# Altium PCB NRF52832_ball_RevB.PcbDoc
Units mm, origin at the board's own origin, x right, y up, seen from the top; angles counter-clockwise.
Board outline 28 x 22 mm, 4 copper layers (Top Layer, Layer 1, Layer 2, Bottom Layer), stack 1.561 mm thick; 65 components, 53 nets, 256 pads, 53 vias.
Unrouted connection lines stored in the file: 184.
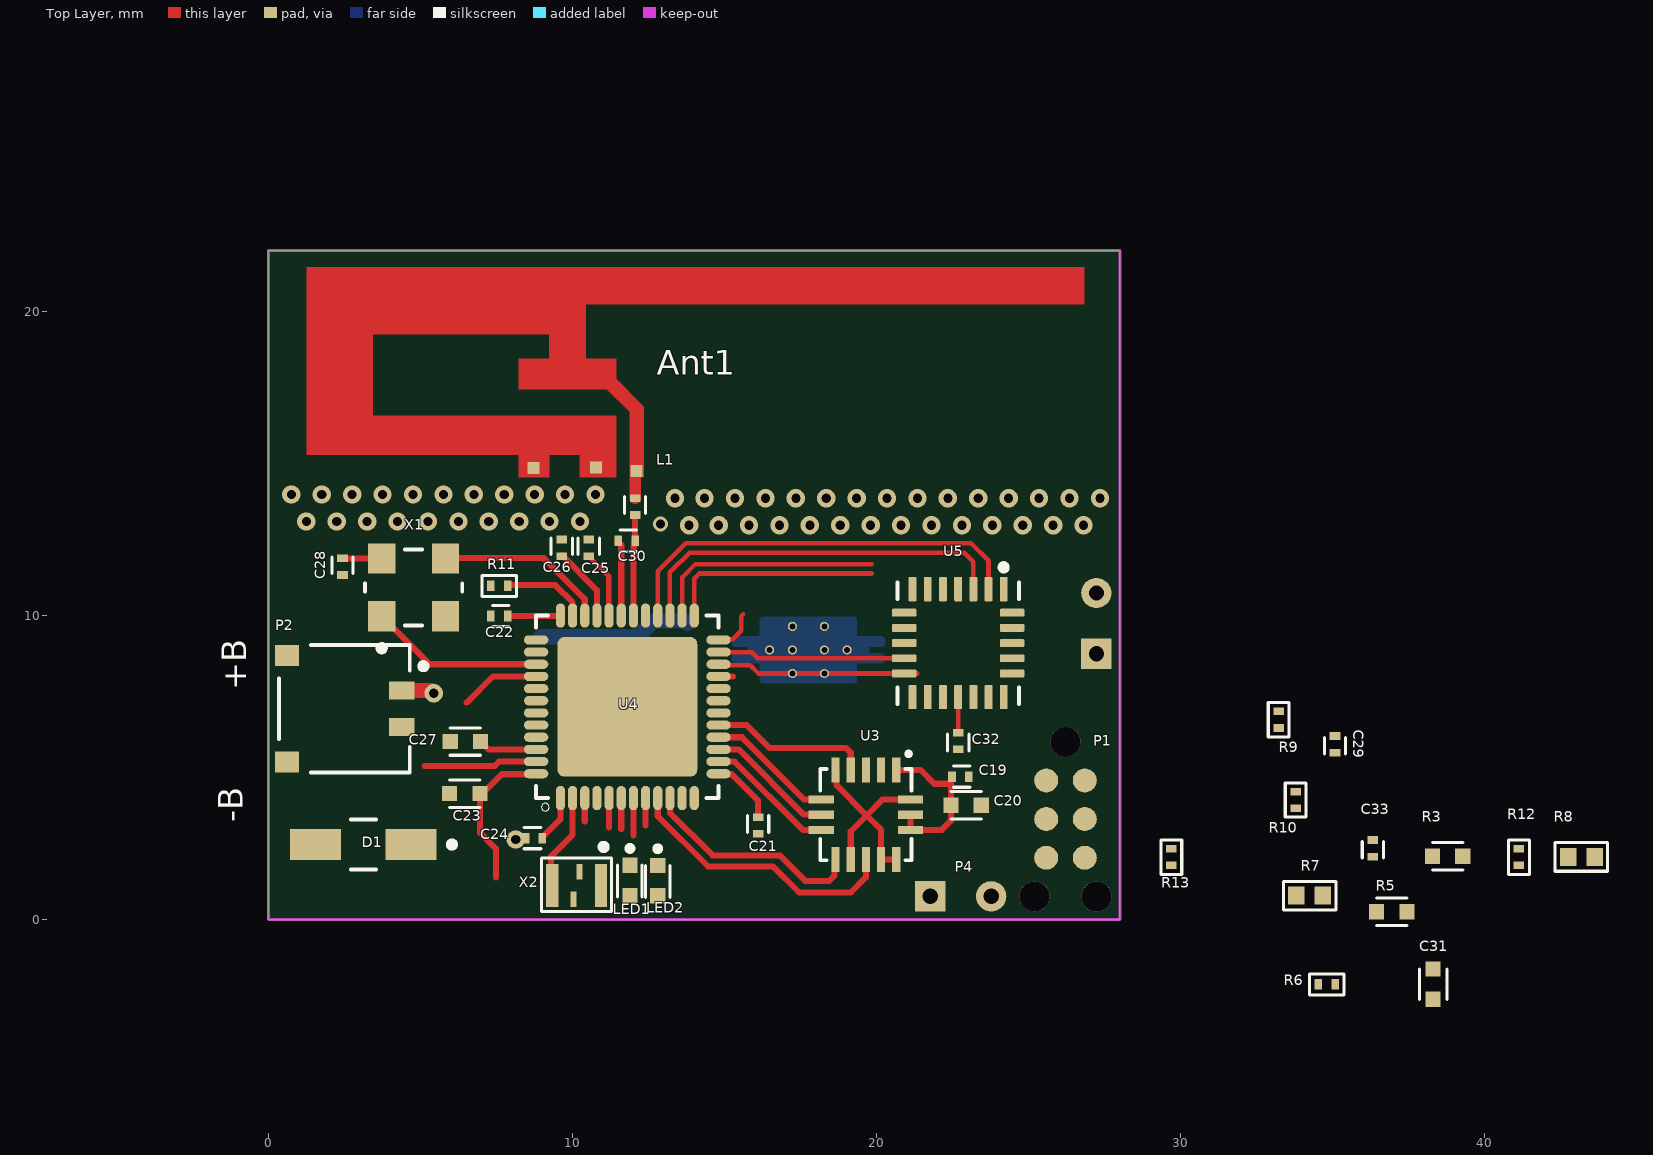
[diagram p0: Top Layer view]
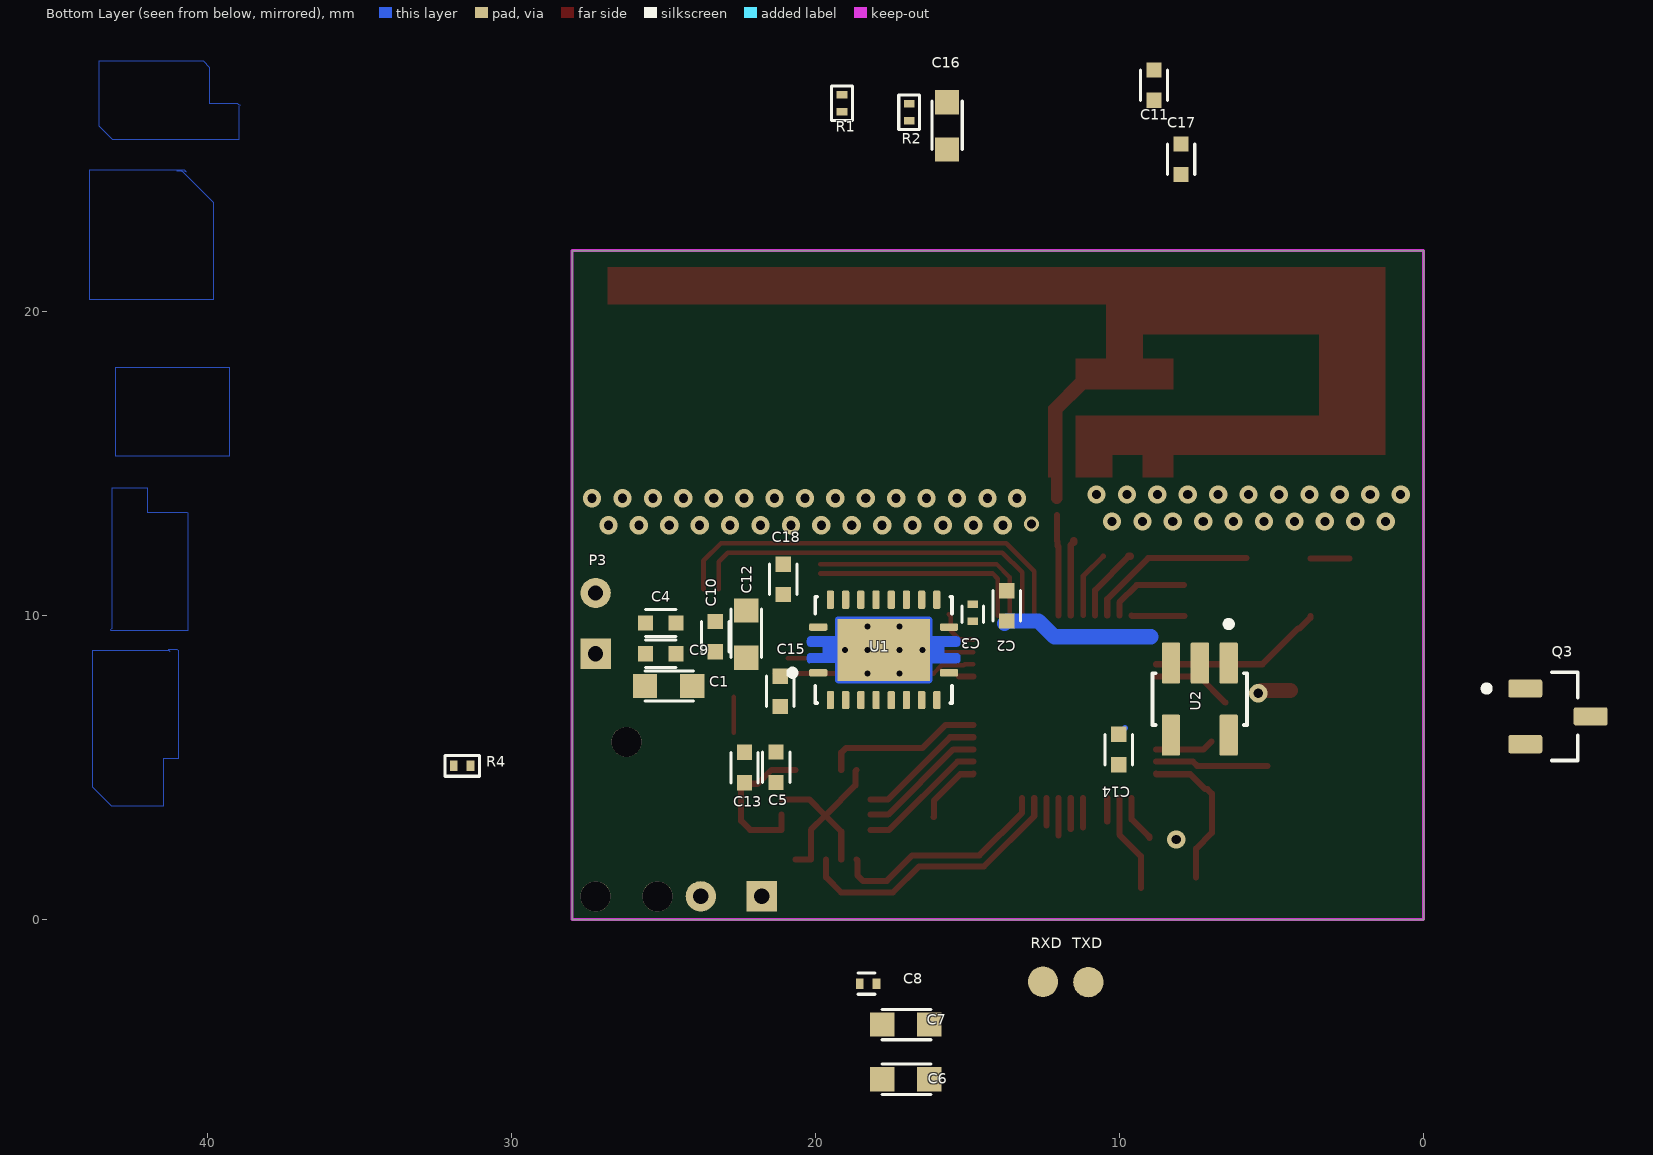
[diagram p1: Bottom Layer view, seen from below]

## Layer stack, top to bottom
Top Solder: solder mask 0.0102, Solder Resist, Dk 3.5
Top Layer: signal copper 0.0356
Dielectric 2: prepreg 0.11, PP-006, Dk 4.29
Layer 1: signal copper 0.035
Dielectric 1: dielectric 1.2, FR-4, Dk 4.8
Layer 2: signal copper 0.035
Dielectric 3: prepreg 0.11, PP-006, Dk 4.29
Bottom Layer: signal copper 0.0356
Bottom Solder: solder mask 0.0102, Solder Resist, Dk 3.5

## Board outline
0,0 0,22 28,22 28,0

## Design rules (kind name [scope] priority, off if disabled: settings)
Clearance [All] p1: gap=0.254 ignorepadtopadclearanceinfootprint=TRUE except(0: Arc-Hole Track-Hole SMDPad-Hole THPad-Hole Via-Hole Fill-Hole Poly-Hole Region-Hole Text-Hole; 0.15: Arc-SMDPad Track-SMDPad; 0.16: Arc-Arc Arc-Track Track-Track; 0.18: SMDPad-Fill SMDPad-Poly SMDPad-Region; 0.2: Arc-THPad Arc-Via Arc-Fill Arc-Poly Arc-Region Track-THPad Track-Via Track-Fill Track-Poly Track-Region SMDPad-SMDPad SMDPad-THPad SMDPad-Via THPad-THPad)
ComponentClearance [All] p1: gap=0.01 collisioncheckmode=3 verticalgap=0.01 showdistances=FALSE
PlaneClearance [All] p1: clearance=0.3
PolygonConnect [All] p1: connectstyle=Direct reliefconductorwidth=0.254 reliefentries=4 polygonreliefangle="90 Angle" airgapwidth=0.254
RoomDefinition NRF52832_ball_RevB [InComponentClass('NRF52832_ball_RevB')] p1: confinementstyle=ConfineOut formatcopy=TRUE lockcomponents=FALSE outline -329.641,-168.758 -278.841,-168.758 -278.841,-143.358 -329.641,-143.358
RoutingVias [All] p1: holewidth=0.3 width=0.5 viastyle="Through Hole" minholewidth=0.2 minwidth=0.4 maxholewidth=5 maxwidth=7
SolderMaskExpansion [All] p1: expansion=0.102 istentingtop=FALSE
Width [All] p1: maxlimit=5 minlimit=0.15 preferedwidth=0.254 toplayer_prefwidth=0.2 midlayer1_minwidth=0.254 midlayer2_minwidth=0.254 bottomlayer_prefwidth=0.2 minimp=50.000000 maximp=50.000000 favimp=50.000000
28 further rules are at their usual default settings.

## Components (designator, comment, footprint, x,y, rotation, side; value= is the part's Value field where it differs from the comment)
Ant1 "Antenna" INVERTED_F_ANTENNA 1.253,14.539 r0 top
C1 "68nF" C0603 25.605,7.679 r180 bottom
C2 "1uF" C0402 13.71,9.815 r90 bottom
C3 "100nF" C0201 14.828,9.815 r90 bottom
C4 "47nF" C0402 25.583,9.752 r180 bottom
C5 "10nF" C0402 21.292,5.507 r270 bottom
C6 "10uF" C0603 17.805,-5.258 r180 bottom
C7 "10uF" C0603 17.805,-3.454 r180 bottom
C8 "100nF" C0201 18.542,-2.108 r180 bottom
C9 "39nF" C0402 25.583,8.736 r180 bottom
C10 "100pF" C0402 23.292,8.804 r90 bottom
C11 "22nF" C0402 8.865,26.94 r90 bottom
C12 "2.2nF" C0603 22.276,8.61 r90 bottom
C13 "470nF" C0402 22.333,5.497 r270 bottom
C14 "4.7uF" C0402 10.026,6.09 r270 bottom
C15 "10nF" C0402 21.158,7.001 r90 bottom
C16 "22uF" C0603 15.672,25.324 r90 bottom
C17 "22nF" C0402 7.976,25.502 r270 bottom
C18 "470nF" C0402 21.057,10.684 r90 bottom
C19 "100nF" C0201 23.029,4.699 r180 top
C20 "1uF" C0402 22.444,3.759 r0 top
C21 "100nF" C0201 16.104,3.369 r270 top
C22 "100nF" C0201 7.865,9.982 r180 top
C23 "4.7uF" C0402 5.96,4.14 r0 top
C24 "100nF" C0201 8.46,2.677 r0 top
C25 "100nF" C0201 10.534,12.498 r270 top
C26 "100nF" C0201 9.645,12.498 r270 top
C27 "1uF" C0402 6.978,5.852 r180 top
C28 "100nF" C0201 2.438,11.878 r270 top
C29 "100nF" C0201 35.077,5.486 r90 top
C30 "0.8pF" C0201 12.058,12.456 r180 top
C31 "1uF" C0402 38.303,-2.626 r90 top
C32 "100nF" C0201 22.682,5.597 r90 top
C33 "100nF" C0201 36.322,2.066 r90 top
D1 "MBR120LSFT3" SOD-123FL 3.124,2.464 r180 top
L1 "3.9nH  Inductor" C0201 12.058,13.853 r270 top
LED1 "GREEN" "led 0402" 11.887,1.787 r270 top
LED2 "RED" "led 0402" 12.802,1.778 r270 top
P1 "NO FIT" TAG_TC2030-IDC-NL 26.213,3.302 r270 top
P2 "BM02B-ACHSS-GAN-TF(LF)(SN)" JST_BM02B-ACHSS-GAN-TF(LF)(SN) 2.497,6.932 r270 top
P3 "Coil" "2 pin" 27.229,8.738 r90 bottom
P4 "NO FIT" "2 pin" 21.768,0.762 r0 top
Q3 "DMG3415U-7" SOT-23 -4.42,6.68 r180 bottom
R1 "10K" R0201 19.126,26.568 r90 bottom
R2 "100K" R0201 16.916,26.822 r270 bottom
R3 "390R" C0402 38.278,2.083 r0 top
R4 "1K" R0201 31.344,5.055 r0 bottom
R5 "200R" C0402 36.44,0.254 r0 top
R6 "47K" R0201 35.077,-2.134 r180 top
R7 "330R" R0402 34.239,0.787 r0 top
R8 "330R" R0402 43.18,2.057 r0 top
R9 "4.7K" R0201 33.223,6.299 r90 top
R10 "4.7K" R0201 33.782,3.658 r90 top
R11 "1K" R0201 7.865,10.973 r180 top
R12 "100K" R0201 41.123,1.778 r90 top
R13 "1K" R0201 29.693,1.778 r90 top
RXD "TP" TP 12.515,-2.048 r90 bottom
TXD "TP" TP 11.024,-2.057 r90 bottom
U1 "BQ51050BRHLR" QFN-20-EP(3.7X4.7) 17.757,8.866 r90 bottom
U2 "AP2112K-3.3TRG1" SOT-25-5 7.359,7.249 r270 bottom
U3 "H3LIS331DLTR" TFLGA-16(3x3) 19.65,3.448 r270 top
U4 "NRF52832-QFAA-R" VFQFN-48 11.804,6.995 r90 top
U5 "FXAS21002CQR1" QFN50P400X400X105-24N 22.682,9.09 r270 top
X1 "ASEMB-32.000MHZ-LY-T" XTAL_ASEMB-32.000MHZ-LY-T 4.775,10.922 r90 top
X2 "SIT1533AC-H5-DCC-32.768" SMD2012-4P 10.135,1.118 r180 top

## Footprints (in the part's own frame and the unit in brackets; to place one, negate y for a bottom-side part, rotate by r counter-clockwise, add the part's x,y. Pads: shape width x height; smd on the part's side, far side on the other; paste and mask are expansions set on the pad)
"2 pin" [mm]
  rect 1x1 hole 0.5: 1(0,0)
  round 1 hole 0.5: 2(2,0)
C0201 [mm]
  rect 0.25x0.35 smd: 1(0,0) 2(0.55,0)
  silkscreen extent -0.05,-0.35 0.5,0.35, body extent 0,-0.15 0.6,0.15, height 0.29
C0402 [mm]
  rect 0.5x0.5 smd: 1(0,0) 2(1,0)
  silkscreen extent 0,-0.45 1,0.45, body extent 0,-0.25 1,0.25, height 0.55
C0603 [mm]
  rect 0.8x0.8 smd: 1(0,0) 2(1.55,0)
  silkscreen extent 0,-0.5 1.6,0.5, body extent 0,-0.4 1.6,0.4, height 0.81
INVERTED_F_ANTENNA [mm]
  rect 0.4x0.4 smd mask+0.102: 1(10.85,0.21) 2(7.468,0.305) 2(9.525,0.33)
  Top Layer region: 25.58,6.91 0,6.91 0,0.74 6.98,0.74 6.98,0 7.98,0 7.98,0.74 8.98,0.74 8.98,0 10.18,0 10.18,2.03 2.18,2.03 2.18,4.7 7.98,4.7 7.98,3.9 6.98,3.9 6.98,2.9 10.18,2.9 10.18,3.9 9.18,3.9 9.18,5.7 9.18,5.7 9.18,5.7 9.18,5.7 9.18,5.7 9.18,5.7 9.18,5.7 9.18,5.7 9.18,5.7 9.18,5.7 9.18,5.7 25.58,5.7
  Top Layer region: 10.63,0 11.09,0 11.09,2.327 10.63,2.327
  Top Layer region: 9.741,3.035 10.066,3.36 11.095,2.332 10.77,2.007
JST_BM02B-ACHSS-GAN-TF(LF)(SN) [mm]
  rect 0.6x0.85 smd: 1(-0.6,1.887) 2(0.6,1.887)
  rect 0.7x0.8 smd: S1(-1.75,-1.887) S2(1.75,-1.887)
  silkscreen extent -2.1,-2.15 2.1,2.7, body extent -2.1,-2.15 2.1,2.15, height 1.45
"led 0402" [mm]
  rect 0.5x0.5 smd: 1(0,0) 2(1,0)
  silkscreen extent -0.6,-0.4 1.05,0.4, body extent 0,-0.25 1,0.25, height 0.16
QFN50P400X400X105-24N [mm]
  rrect25% 0.8x0.26 smd: 1(-1.775,1.5) 2(-1.775,1) 3(-1.775,0.5) 4(-1.775,0) 5(-1.775,-0.5) 6(-1.775,-1) 7(-1.775,-1.5) 13(1.775,-1.5) 14(1.775,-1) 15(1.775,-0.5) 16(1.775,0) 17(1.775,0.5) 18(1.775,1) 19(1.775,1.5)
  rrect25% 0.26x0.8 smd: 8(-1,-1.775) 9(-0.5,-1.775) 10(0,-1.775) 11(0.5,-1.775) 12(1,-1.775) 20(1,1.775) 21(0.5,1.775) 22(0,1.775) 23(-0.5,1.775) 24(-1,1.775)
  silkscreen extent -2.59,-2 2,2
QFN-20-EP(3.7X4.7) [mm]
  rrect40% 0.24x0.6 smd: 1(-0.75,2.15) 10(-0.75,-2.15) 11(0.75,-2.15) 20(0.75,2.15)
  rrect40% 0.6x0.24 smd: 2(-1.65,1.75) 3(-1.65,1.25) 4(-1.65,0.75) 5(-1.65,0.25) 6(-1.65,-0.25) 7(-1.65,-0.75) 8(-1.65,-1.25) 9(-1.65,-1.75) 12(1.65,-1.75) 13(1.65,-1.25) 14(1.65,-0.75) 15(1.65,-0.25) 16(1.65,0.25) 17(1.65,0.75) 18(1.65,1.25) 19(1.65,1.75)
  rect 2.05x3.05 smd paste-3 mask+0: 21(0,0)
  round 0.3 hole 0.2 mask+0: 22(0,1.275) 23(-0.775,0.525) 24(0,0.525) 25(0.775,0.525) 26(-0.775,-0.525) 27(0,-0.525) 28(0.775,-0.525) 29(0,-1.275)
  Top Layer region: 381 vertices and 0 holes, not listed, extent -1.095,-2.52 1.095,2.52
  silkscreen extent -1.75,-2.25 1.75,3.1, body extent -1.75,-2.25 1.75,2.25, height 1
R0201 [mm]
  rect 0.25x0.35 smd: 1(0,0) 2(0.55,0)
  silkscreen extent -0.29,-0.34 0.84,0.34, body extent 0,-0.15 0.6,0.15, height 0.23
R0402 [mm]
  rect 0.54x0.6 smd: 1(-0.432,0) 2(0.432,0)
  silkscreen extent -0.86,-0.47 0.86,0.47, body extent -0.5,-0.25 0.5,0.25, height 0.4
SMD2012-4P [mm] "32.768KHZ"
  rect 0.4x1.4 smd: 1(-0.8,0) 3(0.8,0)
  rect 0.2x0.5 smd: 2(-0.1,-0.45) 4(0.1,0.45)
  silkscreen extent -1.15,-1.37 1.15,0.85
SOD-123FL [mm] "Diode Schottky 20 V 1A Surface Mount"
  rect 1.68x1.01 smd: 1(-1.57,0) 2(1.57,0)
  silkscreen extent -3.01,-0.82 0.41,0.82, body extent -1.96,-0.88 1.74,0.92, height 1.3
SOT-23 [mm]
  rrect25% 1.12x0.6 smd: 1(-1.075,0.915) 2(-1.075,-0.915) 3(1.075,0)
  silkscreen extent -2.44,-1.45 0.65,1.45, body extent -1.2,-1.45 1.2,1.45, height 1.1
SOT-25-5 [mm]
  rrect15% 1.35x0.6 smd: 1(-1.185,0.95) 2(-1.185,0) 3(-1.185,-0.95) 4(1.185,-0.95) 5(1.185,0.95)
  silkscreen extent -2.57,-1.55 0.85,1.55, body extent -1.4,-1.5 1.4,1.5, height 1.4
TAG_TC2030-IDC-NL [mil]
  round 30.98 smd paste-39.37: 1(-50,-25) 2(-50,25) 3(0,-25) 4(0,25) 5(50,-25) 6(50,25)
  round 39.02 hole 39.02 unplated: ""(-100,0) ""(100,40) ""(100,-40)
TFLGA-16(3x3) [mm]
  rect 0.83x0.27 smd: 1(-1.47,1) 2(-1.47,0.5) 3(-1.47,0) 4(-1.47,-0.5) 5(-1.47,-1) 9(1.47,-1) 10(1.47,-0.5) 11(1.47,0) 12(1.47,0.5) 13(1.47,1)
  rect 0.27x0.83 smd: 6(-0.5,-1.47) 7(0,-1.47) 8(0.5,-1.47) 14(0.5,1.47) 15(0,1.47) 16(-0.5,1.47)
  silkscreen extent -2.07,-1.5 1.5,1.5
TP [mm]
  round 1 smd: 1(0,0)
VFQFN-48 [mm]
  oval 0.8x0.3 smd mask+0: 1(-3,2.2) 2(-3,1.8) 3(-3,1.4) 4(-3,1) 5(-3,0.6) 6(-3,0.2) 7(-3,-0.2) 8(-3,-0.6) 9(-3,-1) 10(-3,-1.4) 11(-3,-1.8) 12(-3,-2.2) 25(3,-2.2) 26(3,-1.8) 27(3,-1.4) 28(3,-1) 29(3,-0.6) 30(3,-0.2) 31(3,0.2) 32(3,0.6) 33(3,1) 34(3,1.4) 35(3,1.8) 36(3,2.2)
  oval 0.3x0.8 smd mask+0: 13(-2.2,-3) 14(-1.8,-3) 15(-1.4,-3) 16(-1,-3) 17(-0.6,-3) 18(-0.2,-3) 19(0.2,-3) 20(0.6,-3) 21(1,-3) 22(1.4,-3) 23(1.8,-3) 24(2.2,-3) 37(2.2,3) 38(1.8,3) 39(1.4,3) 40(1,3) 41(0.6,3) 42(0.2,3) 43(-0.2,3) 44(-0.6,3) 45(-1,3) 46(-1.4,3) 47(-1.8,3) 48(-2.2,3)
  rrect10% 4.6x4.6 smd paste-3: 49(0,0)
  silkscreen extent -3.43,-3 3,3
XTAL_ASEMB-32.000MHZ-LY-T [mm]
  rect 1x0.9 smd: 1(-0.95,1.05) 2(-0.95,-1.05) 3(0.95,-1.05) 4(0.95,1.05)
  silkscreen extent -2.1,-1.6 1.25,1.6, body extent -1.25,-1.6 1.25,1.6, height 0.41

## Part data
C1: "25V 68nF +80% 0603  Multilayer Ceramic Capacitors MLCC - SMD/SMT ROHS", JLCPCBPart#=C388115, Package=0402, MF="Walsin Tech Corp", MP=0402F683Z160CT
C2 C20 C27 C31: library part "Capacitor 1uF", JLCPCBPart#=C528974, MF=muRata(村田), MP=GRM155Z71A105KE01D, Packag=C0402
C3 C8 C19 C21 C22 C24 C25 C26 C28 C29 C32 C33: library part "Capacitor 100nF", JLCPCBPart#=C161494, Package=C0201, MF=muRata(村田), MP=GRM033Z71A104KE14D
C4: "25V 47nF X5R 0402  Multilayer Ceramic Capacitors MLCC - SMD/SMT ROHS", Package=0402, MF=CCTC
C5 C15: "50V 10nF X5R ±10% 0402  Multilayer Ceramic Capacitors MLCC - SMD/SMT ROHS", JLCPCBPart#=C147682, Package=0402, MF="Darfon Elec", MP=C1005X5R103KGTS
C6 C7: library part "Capacitor 10uF", JLCPCBPart#=C344022, Package=C0603, MF=Murata, MP=GRM188R61E106KA73D
C9: "25V 39nF X7R ±10% 0402  Multilayer Ceramic Capacitors MLCC - SMD/SMT ROHS", Package=0402, MF="Samsung Electro-Mechanics"
C10: "25V 100pF C0G ±5% 0402  Multilayer Ceramic Capacitors MLCC - SMD/SMT ROHS", Package=0402
C11 C17: "25V 22nF X7R ±10% 0402  Multilayer Ceramic Capacitors MLCC - SMD/SMT ROHS", JLCPCBPart#=C183767, Package=0402, MF="EYANG(Shenzhen Eyang Tech Development)", MP=C0402X7R223K250NTB
C12: "25V 2.2nF X7R ±10% 0603 Multilayer Ceramic Capacitors MLCC - SMD/SMT ROHS", Package=0603
C13 C18: "50V 100pF C0G ±5% 0603  Multilayer Ceramic Capacitors MLCC - SMD/SMT ROHS", JLCPCBPart#=C188346, Package=0402, MF="IHHEC(HOLY STONE ENTERPRISE CO., LTD)", MP=C0402B474K010T
C14 C23: library part "capacitor 4.7uF", JLCPCBPart#=C23733, Package=C0402, MF=SAMSUNG(三星), MP=CL05A475MP5NRNC
C16: library part "capacitor 22uF", JLCPCBPart#=C84419, Package=C0603, MF=muRata(村田), MP=GRM188R61A226ME15D
C30: library part "Capacitor 0.8pF", JLCPCBPart#=C327151, Package=C0201, MF=YAGEO(国巨), MP=CC0201CRNPO9BNR80
D1: "20V 1A 650mV@3A SOD-123FL Schottky Barrier Diodes (SBD) ROHS", JLCPCBPart#=C896755, Package=SOD-123FL, MF=onsemi, MP=MBR12LSFT3G
L1: JLCPCBPart#=C136219, MF=TDK, MP=MLG0603S3N9ST000, Packag=L0201
LED1: library part LED, JLCPCBPart#=C130723, Package=LED0402-RD, MF=Foshan, MP=NCD0402G1
LED2: library part LED, JLCPCBPart#=C130719, Package=LED0402-RD, MF=Foshan, MP=NCD0402R1
P1: library part "IDC MCU Debug", "CABLE ADAPTER 6 POS", Price=None
P2: "Connector Header Surface Mount, Right Angle 2 position 0.047 (1.20mm)", JLCPCBPart#=C5118738, Availability="In Stock", MF="JST Sales", MP=BM02B-ACHSS-GAN-TF(LF)(SN), Price=None
P4: library part Coil
Q3: JLCPCB Part Class="Extended Part", Manufacturer=DIODES(美台), Contributor=LCSC, link=https://lcsc.com/eda_search?q=C96616&%26type=1&ref=editor, Manufacturer Part=DMG3415U-7, spicePre=Q, spiceSymbolName=DMG3415U-7, Supplier=LCSC, Supplier Part=C96616
R1: library part "resistor 10K", JLCPCBPart#=C106225, Package=R0201, MF=YAGEO(国巨), MP=RC0201FR-0710KL
R2 R12: JLCPCBPart#=C106224, Package=R0201, MF=YAGEO(国巨), MP=RC0201FR-07100KL
R3: "62.5mW Thin Film Resistor ±25ppm/℃ ±1% 390Ω 0402 Chip Resistor -", JLCPCBPart#=C284545, MF="Viking Tech", MP=ARG02FTC3900, Packag=0402
R4 R11 R13: library part "resistor 1K", JLCPCBPart#=C131396, Package=R0201, MF=YAGEO(国巨), MP=RC0201JR-071KL
R5: "62.5mW Thick Film Resistors ±1% ±200ppm/℃ 200Ω 0402  Chip Resistor - Surface Mount ROHS", JLCPCBPart#=C2991514, MF="FH (Guangdong Fenghua Advanced Tech)", MP=RHC-02W2000FT, Packag=0402
R6: "50mW Thick Film Resistors ±5% ±200ppm/℃ 47kΩ 0201  Chip Resistor - Surface Mount ROHS", JLCPCBPart#=C2076652, Package=0201, MF="Vishay Intertech", MP=CRCW020147K0JNED
R7 R8: JLCPCBPart#=C105876, Package=R0402, MF=YAGEO(国巨), MP=RC0402JR-07330RL
R9 R10: "50mW Thick Film Resistors ±5% ±200ppm/℃ 4.7kΩ 0201  Chip Resistor - Surface Mount ROHS", JLCPCBPart#=C2073629, Package=0201, MF="Vishay Intertech", MP=CRCW02014K70JNED
U1: "QFN-20-EP(3.7x4.7) Battery Management ICs ROHS", JLCPCBPart#=C133307, ComponentLink1Description="New link", ComponentLink1URL=https://jlcpcb.com/partdetail/TexasInstruments-BQ51050BRHLR/C133307, MF="Texas Instruments", MP=BQ51050BRHLR, Packag=QFN-20-EP(3.7x4.7)
U2: library part APK2112K-3.3TRG1, "65dB@(100Hz,1kHz) 600mA Fixed 3.3V~3.3V Positive 6V SOT-23-5 Linear Voltage Regulators (LDO) ROHS", JLCPCBPart#=C51118, Package=SOT-25-5, MF="Diodes Incorporated", MP=AP2112K-3.3TRG1
U3: "TFLGA-16(3x3) Attitude Sensor/Gyroscope ROHS", JLCPCBPart#=C2655074, Package=TFLGA-16(3x3), MF=STMicroelectronics, MP=H3LIS331DLTR
U4: "2Mbps 2.4GHz Bluetooth 2.4GHz I2C,SPI,UART QFN-48-EP(6x6) RF Transceiver ICs ROHS", JLCPCBPart#=C77540, MF="Nordic Semicon", MP=NRF52832-QFAA-R, Packag=QFN-48-EP(6x6)
U5: "Gyroscope X _Pitch_, Y _Roll_, Z _Yaw_ Â±250, 500, 1000, 2000 4Hz ~ 256Hz IÂ²C, SPI 24-QFN _4x4_", Package="TFQFN-24 NXP Semiconductors", Availability=Unavailable, MF="NXP USA", MP=FXAS21002CQR1, Price=None, SnapEDA_Link=https://www.snapeda.com/parts/FXAS21002CQR1/NXP%20USA%20Inc./view-part/527548/?ref=snap
X1: Package=None, Availability=Unavailable, MP=ASEMB-32.000MHZ-LY-T, Price=None
X2: "±75ppm LVCMOS 1.2V~3.63V 32.768kHz SMD2012-4P Pre-programmed Oscillators ROHS", JLCPCBPart#=C377830, MF=SiTime, MP=SiT1533AC-H5-DCC-32.768, Packag=SMD2012-4P

## Via types
v1: diameter 0.6, hole 0.3, Top Layer to Bottom Layer, tented both sides, 52 vias
v2: diameter 0.5, hole 0.3, Top Layer to Bottom Layer, tented both sides, 1 vias

## Nets (pads, with @x,y where several pads share a name; then routed paths per layer and width w, separated by ;. In a path a pad name is that pad's centre, name@x,y a point inside that pad or via, vN(x,y) a via of type N, cw(c..) or ccw(c..) an arc to the next point about the centre after c; other vN are vias at no path point)
GND: Ant1.2 C2.2 C3.1 C6.2 C7.2 C8.1 C14.2 C16.2 C19.1 C20.2 C21.2 C22.2 C23.1 C24.1 C25.1 C26.1 C27.2 C28.2 C29.1 C30.2 C31.2 C32.1 C33.2 LED1.1 P1.5 P2.2 P4.2 R2.1 R4.1 R5.1 R11.2 R13.1 U1.1 U1.9 U1.20 U1.21 U1.22 U1.23 U1.24 U1.25 U1.26 U1.27 U1.28 U1.29 U2.2 U3.5 U3.10 U3.12 U3.13 U3.16 U4.31 U4.45 U4.49 U5.1 U5.5 U5.6 U5.7 U5.8 U5.9 U5.10 U5.13 U5.14 U5.19 U5.20 U5.21 U5.22 U5.23 U5.24 X1.2 X2.2 | length 9.9
  Top Layer w0.2: C30.2@11.481,12.446 11.508,12.419 11.604,12.323 U4.31 ; U3.5 18.685,4.883 18.685,4.413 19.65,3.448 19.677,3.421 ; U3.10 19.15,2.894 19.677,3.421 ; U3.13 U3.12 20.15,2.948 19.677,3.421 ; U3.16 20.204,3.948 19.677,3.421
  Top Layer w0.254: C30.2@11.508,12.41 11.508,12.419 C30.2
  other v1: 8.133,2.63 13.836,12.964 14.806,12.964 15.806,12.964 16.806,12.964 17.806,12.964 18.806,12.964 19.806,12.964 20.806,12.964 21.806,12.964 22.806,12.964 23.806,12.964 24.806,12.964 25.806,12.964 26.806,12.964 1.247,13.091 2.247,13.091 3.247,13.091 4.247,13.091 5.247,13.091 6.247,13.091 7.247,13.091 8.247,13.091 9.247,13.091 10.247,13.091 13.374,13.853 14.344,13.853 15.344,13.853 16.344,13.853 17.344,13.853 18.344,13.853 19.344,13.853 20.344,13.853 21.344,13.853 22.344,13.853 23.344,13.853 24.344,13.853 25.344,13.853 26.344,13.853 27.344,13.853 0.755,13.98 1.755,13.98 2.755,13.98 3.755,13.98 4.755,13.98 5.755,13.98 6.755,13.98 7.755,13.98 8.755,13.98 9.755,13.98 10.755,13.98
  other v2: 12.893,13.01
NetAnt1_1: Ant1.1 L1.1 | length 0.9
  Top Layer w0.381: L1.1 12.062,13.857 Ant1.1@12.062,14.749
NetC1_1: C1.1 C4.1 C9.1 P3.1
NetC1_2: C1.2 C4.2 C5.1 C9.2 C10.1 C11.1 C12.1 C13.1 U1.2
NetC5_2: C5.2 U1.3
NetC6_1: C6.1 C7.1 C8.2 R1.2 U1.18
NetC10_2: C10.2 C12.2 C15.1 C17.1 C18.1 P3.2 U1.19
NetC11_2: C11.2 U1.6
NetC13_2: C13.2 U1.5
NetC15_2: C15.2 U1.17
NetC16_1: C16.1 D1.1 Q3.3 R12.2 U2.1
NetC17_2: C17.2 U1.15
NetC18_2: C18.2 U1.16
NetC24_2: C24.2 U4.1 | length 1.6
  Top Layer w0.2: C24.2 9.01,2.727 9.035,2.752 9.061,2.752 9.604,3.295 U4.1
NetC25_2: C25.2 U4.32 | length 2.2
  Top Layer w0.17: C25.2 11.19,11.292 U4.32@11.19,9.995
NetC26_2: C26.2 U4.33 | length 2.5
  Top Layer w0.2: C26.2@9.691,11.948 10.804,10.835 U4.33
  Top Layer w0.254: C26.2 C26.2@9.691,11.948
NetC27_1: C27.1 U4.46 | length 1.9
  Top Layer w0.2: C27.1 7.235,5.595 U4.46
NetC30_1: C30.1 L1.2 U4.30 | length 3.3
  Top Layer w0.2: U4.30 12.004,12.264 12.033,12.293 12.033,12.431 C30.1 L1.2
NetC32_2: C32.2 U5.16 | length 1.2
  Top Layer w0.152: C32.2 U5.16
NetLED1_2: LED1.2 R7.2
NetLED2_1: LED2.1 U1.7
NetLED2_2: LED2.2 R8.2
NetP1_2: P1.2 U4.26 | length 7.7
  Top Layer w0.15: U4.26 13.604,11.249 14.045,11.689 19.837,11.689
NetP1_3: P1.3 U4.24 | length 1.4
  Top Layer w0.15: U4.24 14.821,9.212 15.268,9.212 15.554,9.498 15.554,9.966 15.621,10.033
NetP1_4: P1.4 U4.25 | length 7.1
  Top Layer w0.15: U4.25 14.004,11.21 14.173,11.379 19.837,11.379
NetP1_6: P1.6 U4.21 | length 0.5
  Top Layer w0.2: U4.21 15.278,7.995
NetR1_1: R1.1 R3.2 R5.2 U1.14
NetR3_1: R3.1 U1.12
NetR4_2: R4.2 U1.10
NetR6_2: R6.2 U5.4
NetR7_1: R7.1 U4.8 | length 0.9
  Top Layer w0.2: 12.404,3.093 U4.8
NetR9_1: R9.1 U4.22 U5.12 | length 6.7
  Top Layer w0.152: U4.22 15.094,8.395 15.122,8.367 15.84,8.367 16.116,8.09 U5.12 21.339,8.09
NetR10_1: R10.1 U4.23 U5.11 | length 6.2
  Top Layer w0.152: U4.23 15.894,8.795 16.099,8.59 U5.11
NetR11_1: R11.1 U4.35 | length 2.8
  Top Layer w0.2: R11.1@7.886,10.998 9.432,10.998 10.004,10.426 U4.35
NetR12_1: R12.1 U2.3
NetR13_2: R13.2 U4.3 | length 0.8
  Top Layer w0.2: 10.404,3.226 U4.3
NetRXD_1: RXD.1 U4.6 | length 1
  Top Layer w0.2: 11.604,2.972 U4.6
NetTXD_1: TXD.1 U4.5 | length 1
  Top Layer w0.2: 11.204,3.023 U4.5
NetU3_4: U3.4 U4.17 | length 5.3
  Top Layer w0.2: U4.17 15.729,6.395 16.485,5.639 18.999,5.639 19.15,5.488 U3.4
NetU3_6: U3.6 U4.16 | length 4.2
  Top Layer w0.2: U4.16 15.57,5.995 17.611,3.953 18.174,3.953 U3.6
NetU3_7: U3.7 U4.15 | length 4.3
  Top Layer w0.2: U4.15 15.461,5.595 17.607,3.449 18.179,3.449 U3.7
NetU3_8: U3.8 U4.14 | length 4.3
  Top Layer w0.2: U4.14 15.328,5.195 17.576,2.948 U3.8
NetU3_9: U3.9 U4.10 | length 7.4
  Top Layer w0.2: U4.10 13.204,3.51 14.606,2.108 16.815,2.108 17.653,1.27 18.44,1.27 18.615,1.444 18.615,1.943 U3.9
NetU3_11: U3.11 U4.9 | length 9.3
  Top Layer w0.2: U4.9 12.804,3.401 14.457,1.748 16.591,1.748 17.45,0.889 19.152,0.889 19.65,1.387 U3.11
NetU4_2: U4.2 X2.3 | length 3.2
  Top Layer w0.2: X2.3@9.296,1.041 9.296,2.083 10.004,2.791 U4.2
NetU4_20: U4.20 U5.17
NetU4_27: U4.27 U5.3 | length 12.7
  Top Layer w0.152: U4.27 13.204,11.416 13.853,12.065 22.885,12.065 23.182,11.768 U5.3
NetU4_28: U4.28 U5.2 | length 13.9
  Top Layer w0.152: U4.28 12.804,11.458 13.724,12.377 23.106,12.377 23.682,11.802 U5.2
NetU4_34: U4.34 X1.3 | length 5.7
  Top Layer w0.2: X1.3@5.825,11.882 9.058,11.882 10.404,10.535 U4.34
NetU4_39: U4.39 X1.1 | length 5.8
  Top Layer w0.2: X1.1 3.725,9.922 4.075,9.572 4.125,9.572 5.302,8.395 U4.39
V_BATT: C2.1 C3.2 P2.1 Q3.2 R8.1 U1.4 U1.11 | length 6.2
  Top Layer w0.5: P2.1 5.346,7.532 v1(5.436,7.442)
  Bottom Layer w0.5: 8.961,9.296 12.141,9.296 12.659,9.815 C2.1 C2.1@13.787,9.738
VDD: C14.1 C19.2 C20.1 C21.1 C22.1 C23.2 C28.1 C29.2 C31.1 C33.1 P1.1 R6.1 R9.2 R10.2 U2.5 U3.1 U3.14 U3.15 U4.13 U4.36 U4.48 U5.15 U5.18 X1.4 X2.4 | length 15.8
  Top Layer w0.2: C28.1 3.719,11.878 X1.4 ; C23.2 7.11,4.29 7.187,4.29 7.672,4.776 8.785,4.776 U4.48 ; C23.2@6.962,4.143 6.962,2.851 7.482,2.331 7.482,1.376 ; C22.1 9.592,9.982 U4.36 ; U4.13 14.823,4.776 15.238,4.776 16.103,3.911 C21.1 ; C21.1 C21.1@16.11,3.376 ; U3.1 21.448,4.918 21.902,4.464 22.444,4.464 22.444,3.241 22.15,2.948 U3.14 U3.15
  Bottom Layer w0.2: C14.1@9.817,6.299 C14.1
Vin: D1.2 P4.1 Q3.1 R2.2
pads on no net: P1. P2.S1 P2.S2 U1.8 U1.13 U2.4 U3.2 U3.3 U4.4 U4.7 U4.11 U4.12 U4.18 U4.19 U4.29 U4.37 U4.38 U4.40 U4.41 U4.42 U4.43 U4.44 U4.47 X2.1
copper on no net: | length 7.6
  Top Layer w0.2: 5.131,5.055 7.442,5.055 7.582,5.195 8.804,5.195 ; 6.521,7.131 7.385,7.995 8.804,7.995 ; 12.004,2.769 12.004,3.995

## Polygon pours and split planes (outlines as drawn)
GND on Bottom Layer "GND_L04_P014" (solid, remove dead copper, pour order 14): 57.039,5.145 57.039,9.185 45.939,9.185 45.939,-5.055 73.339,-5.055 73.339,9.155 58.139,9.155 58.139,5.145
NetC16_1 on Bottom Layer "NETC16_1_L04_P012" (solid, remove dead copper, pour order 12): 41.235,8.827 41.245,8.837 43.785,8.837 43.785,4.367 43.165,3.747 41.429,3.747 41.429,5.307 40.945,5.307 40.945,8.837 40.985,8.877 40.995,8.867 41.285,8.867
VDD on Bottom Layer "VDD_L04_P013" (solid, remove dead copper, pour order 13): 82.59,4.85 82.9,4.85 85.87,4.85 85.87,3.71 85.42,3.26 83.91,2.18 83.2,1.62 81.59,0.01 80.045,1.415 80.33,1.7 82.59,3.96 82.59,4.64
Vin on Bottom Layer "VIN_L04_P011" (solid, remove dead copper, pour order 11): 40.663,13.38 40.673,13.37 41.953,13.37 41.953,14.17 41.963,14.18 43.143,14.18 43.143,9.57 43.183,9.53 43.173,9.52 40.633,9.52 40.633,13.36
V_BATT on Bottom Layer "V_BATT_L04_P000" (solid, remove dead copper, pour order 0): 40.688,24.596 40.739,24.647 43.888,24.647 43.888,20.396 39.788,20.396 39.788,23.577 40.831,24.619 41.002,24.619
NetC1_2 on Bottom Layer "NETC1_2_L04_P008" (solid, remove dead copper, pour order 8): 38.968,26.8 38.99,26.823 39.911,26.823 39.911,28.014 40.12,28.223 43.561,28.223 43.561,26.107 43.118,25.664 38.94,25.664 38.94,26.761 38.918,26.783
NetC1_1 on Bottom Layer "NETC1_1_L04_P007" (solid, remove dead copper, pour order 7): 110.737,7.956 110.687,7.956 108.167,7.956 108.167,4.296 108.147,4.276 108.167,4.256 110.737,4.256
NetC10_2 on Bottom Layer "NETC10_2_L04_P006" (solid, remove dead copper, pour order 6): 114.788,11.319 108.188,11.319 107.488,12.019 107.488,15.976 108.878,15.976 108.878,13.449 114.788,13.449
V_BATT on Bottom Layer "V_BATT_L04_P002" (solid, remove dead copper, pour order 2): 39.261,18.152 43.021,18.152 43.021,15.25 39.261,15.25
GND on Top Layer "GND_L01_P010" (solid, remove dead copper, pour order 10): 56.813,35.856 56.813,39.896 45.713,39.896 45.713,25.656 73.113,25.656 73.113,39.866 57.913,39.866 57.913,35.856
V_BATT on Top Layer "V_BATT_L01_P001" (solid, remove dead copper, pour order 1): 42.947,33.605 42.947,31.905 42.947,30.423 38.347,30.423 38.347,33.605 39.447,33.605
V_BATT on Layer 2 "V_BATT_L03_P003" (solid, remove dead copper, pour order 3): 77.093,22.167 81.763,22.167 82.254,17.265 93.402,17.224 94.493,18.827 97.093,18.827 97.093,14.397 77.093,14.397
VDD on Layer 2 "VDD_L03_P004" (solid, remove dead copper, pour order 4): 76.238,11.31 85.638,11.31 85.638,8.51 88.838,8.51 88.838,11.31 100.038,11.31 100.038,0.01 95.138,0.01 95.138,4.349 92.342,4.346 91.1,2.623 80.374,2.407 79.938,7.61 76.238,7.61
GND on Layer 1 "GND_L02_P005" (solid, remove dead copper, pour order 5): 56.813,20.616 56.813,24.656 45.713,24.656 45.713,10.416 73.113,10.416 73.113,24.626 57.913,24.626 57.913,20.616

## Keep-outs
Keep-Out Layer:
  the board outline again, w0.1

## Silkscreen, mask and mechanical layers (free items; w line width, h text height)
Top Overlay:
  text "+B" at -0.737,7.544 h0.8 r90
  text "-B" at -0.838,3.2 h0.8 r90